# Altium PCB bm78.PcbDoc
Units mil, origin at the board's own origin, x right, y up, seen from the top; angles counter-clockwise.
Board outline 1210 x 1081 mil, 2 copper layers (Top, Bottom), stack 12.7 mil thick; 5 components, 21 nets, 91 pads, 69 vias.
Unrouted connection lines stored in the file: 73.
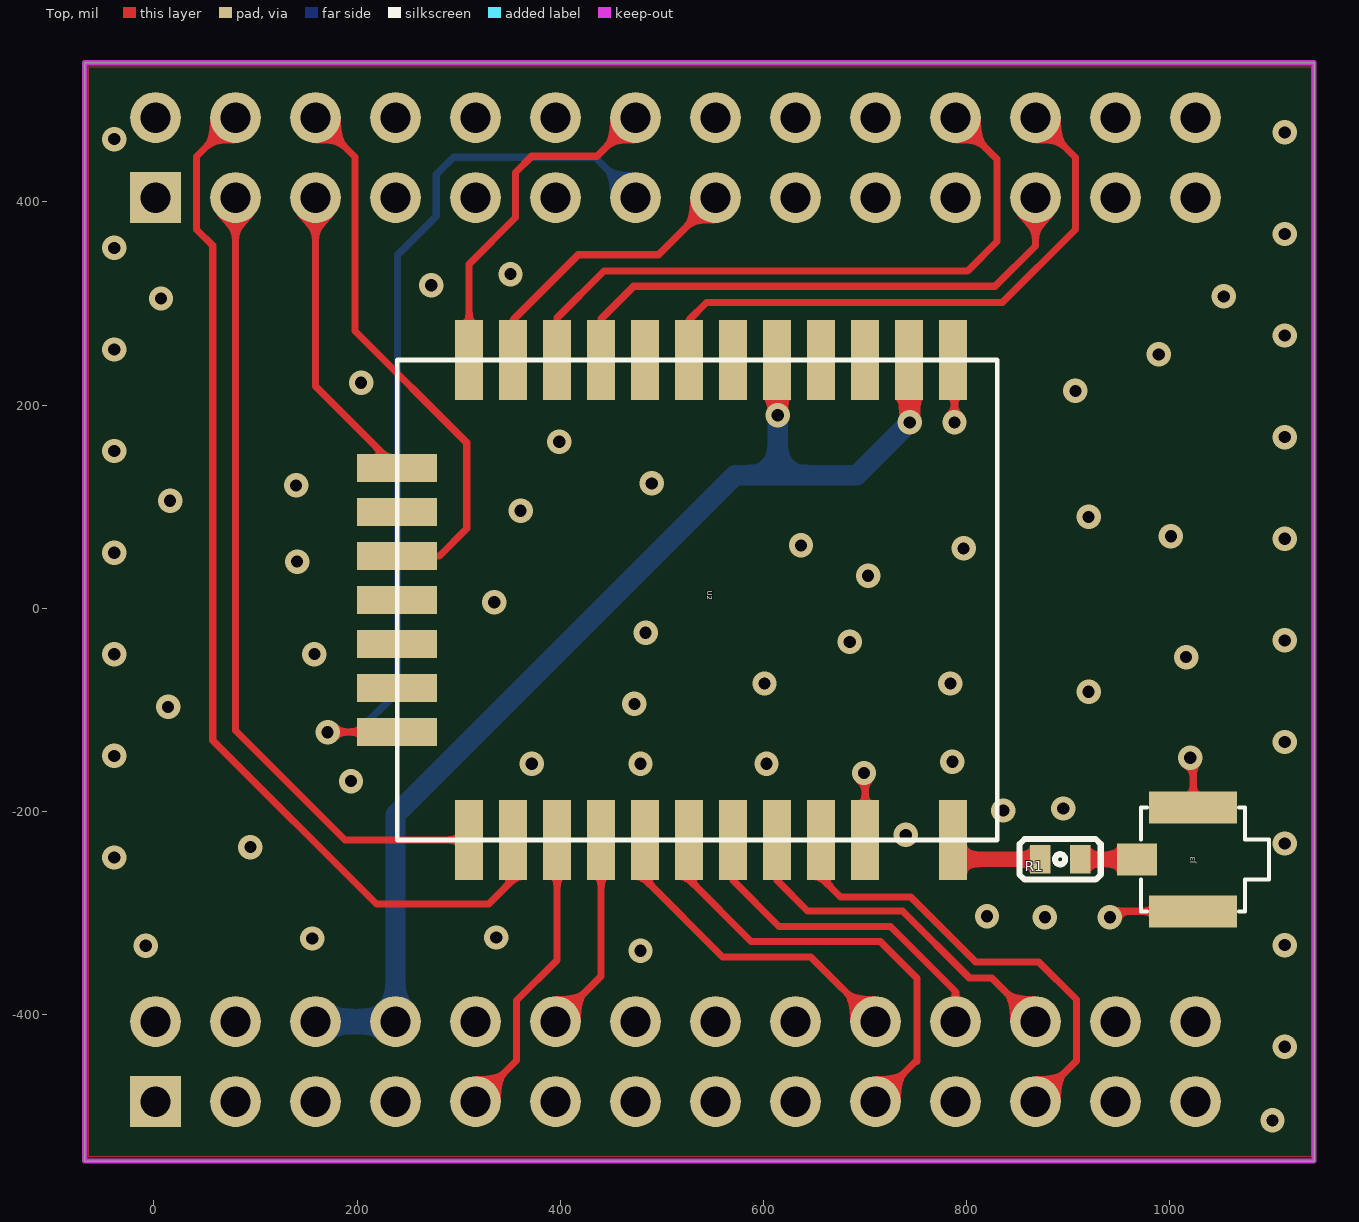
[diagram p0: Top view]
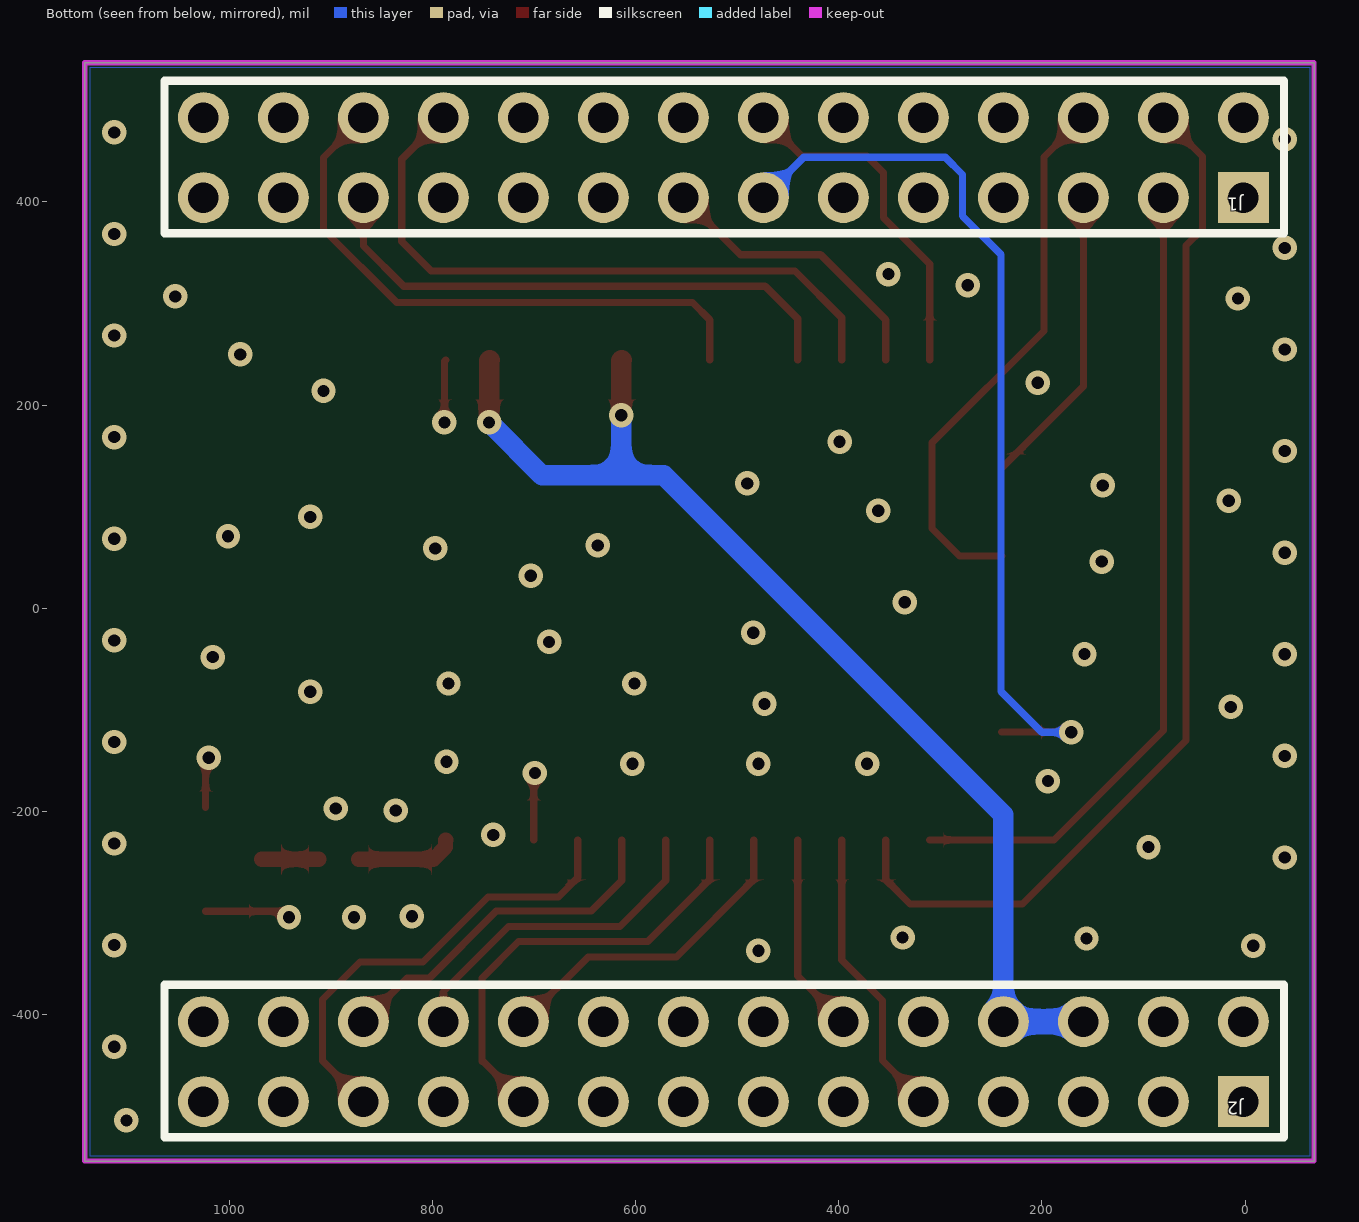
[diagram p1: Bottom view, seen from below]

## Layer stack, top to bottom
Solder Mask Top: solder mask 0.4, Solder Resist, Dk 3.5
Top: signal copper 1.35
Dielectric 1: dielectric 10, FR-4, Dk 4.3
Bottom: signal copper 1.35
Solder Mask Bottom: solder mask 0.4, Solder Resist, Dk 3.5

## Board outline
1142,537 1142,-544 -68,-544 -68,537

## Design rules (kind name [scope] priority, off if disabled: settings)
Clearance "Clearance - Default - DEFAULT- SMD" [IsVia vs IsSMTPin] p1: gap=0
Clearance "Clearance - Default - DEFAULT - Via" [IsVia vs IsVia] p2: gap=0
Clearance "Clearance - Default - DEFAULT - Net" [All] p3: gap=7 except(10: Fill-Fill Fill-Poly Fill-Region Poly-Poly Poly-Region Region-Region Text-Text)
ComponentClearance "ComponentClearance - Default - DEFAULT" [All] p1: gap=6 collisioncheckmode=3 verticalgap=10 showdistances=FALSE
HoleToHoleClearance "HoleToHoleClearance - Default - DEFAULT" [All] p1: gap=6 allowstackedmicrovias=TRUE
Length "Default Length" [All] p1: maxlimit=50000 minlimit=0
MaxMinImpedance "Default Impedance" [All] p1: minimum=50.00 maximum=150.0
ParallelSegment "Default Parallel Segment Same Layer" [All] p1: limit=1000 gap=200
ParallelSegment "Default Parallel Segment Adjasent" [All] p2: limit=1000 gap=200
PlaneConnect "Default PlaneConnect" [All] p1: planeconnectstyle=Relief reliefexpansion=20 reliefentries=0 reliefconductorwidth=5 reliefairgap=10
PolygonConnect "PolygonConnect - Default SMT" [IsSMTPin] p1: connectstyle=Relief reliefconductorwidth=5 reliefentries=4 polygonreliefangle="45 Angle" airgapwidth=10
PolygonConnect "PolygonConnect - Default Pad" [All] p2: connectstyle=Relief reliefconductorwidth=5 reliefentries=4 polygonreliefangle="45 Angle" airgapwidth=10
RoutingLayers "RoutingLayers - Default - DEFAULT" [All] p1: top layer_v5=TRUE bottom layer_v5=TRUE
RoutingPriority "RoutingPriority - Default - DEFAULT" [All] p1: routingpriority=3
RoutingTopology "Default Routing Topology" [All] p1: topology=Shortest
RoutingVias "RoutingVias - Default - DEFAULT" [All] p1: holewidth=37 width=55 viastyle="Through Hole" minholewidth=37 minwidth=55 maxholewidth=37 maxwidth=55
SMDToCorner "SMDToCorner - Default - DEFAULT" [All] p1: distance=0
SolderMaskExpansion "SolderMaskExpansion from CAM settings" [All] p1: expansion=5
Width "Default Width" [All] p1: maxlimit=50 minlimit=7 preferedwidth=7
22 further rules are at their usual default settings.

## Components (designator, comment, footprint, x,y, rotation, side; value= is the part's Value field where it differs from the comment)
J1 "CON28_2MM" CON28_2MM 1.62,404.25 r0 bottom
J2 "CON28_2MM" CON28_2MM 1.62,-485.51 r0 bottom
J3 "CON-IPEX" CON-IPEX 1023,-247 r90 top
R1 "R0402" R0402 892,-247 r0 top
U2 "MODULE_1215_1" MODULE_1215_1 239.5,244.5 r270 top

## Footprints (in the part's own frame and the unit in brackets; to place one, negate y for a bottom-side part, rotate by r counter-clockwise, add the part's x,y. Pads: shape width x height; smd on the part's side, far side on the other; paste and mask are expansions set on the pad)
CON28_2MM [mm]
  rect 1.27x1.27 hole 0.762: 1(0,0)
  round 1.27 hole 0.762: 2(0,-2) 3(2,0) 4(2,-2) 5(4,0) 6(4,-2) 7(6,0) 8(6,-2) 9(8,0) 10(8,-2) 11(10,0) 12(10,-2) 13(12,0) 14(12,-2) 15(14,0) 16(14,-2) 17(16,0) 18(16,-2) 19(18,0) 20(18,-2) 21(20,0) 22(20,-2) 23(22,0) 24(22,-2) 25(24,0) 26(24,-2) 27(26,0) 28(26,-2)
  silkscreen extent -1.02,-2.92 26.97,0.89
CON-IPEX [mm]
  rect 0.8x1 smd: 1(0,1.4)
  rect 0.8x2.2 smd: 2(-1.3,0) 3(1.3,0)
  Top pour cut-out: -1.3,1.3 1.3,1.3 1.3,-1.3 -1.3,-1.3 -1.3,1.3
  silkscreen extent -1.3,-1.9 1.3,1.3
MODULE_1215_1 [mm]
  rect 2x0.7 smd: 1(0,13.9) 2(0,12.8) 3(0,11.7) 4(0,10.6) 5(0,9.5) 6(0,8.4) 7(0,7.3) 8(0,6.2) 9(0,5.1) 10(0,4) 11(0,2.9) 12(0,1.8) 20(12,1.8) 21(12,2.9) 22(12,4) 23(12,5.1) 24(12,6.2) 25(12,7.3) 26(12,8.4) 27(12,9.5) 28(12,10.6) 29(12,11.7) 30(12,13.9)
  rect 0.7x2 smd: 13(2.7,0) 14(3.8,0) 15(4.9,0) 16(6,0) 17(7.1,0) 18(8.2,0) 19(9.3,0)
  silkscreen extent 0,0 12,15
R0402 [mil]
  rect 20x28 smd: 1(-19.69,0) 2(19.69,0)
  silkscreen extent -40,-20 40,20

## Via types
v1: diameter 24, hole 12, Top to Bottom, 69 vias

## Nets (pads, with @x,y where several pads share a name; then routed paths per layer and width w, separated by ;. In a path a pad name is that pad's centre, name@x,y a point inside that pad or via, vN(x,y) a via of type N, cw(c..) or ccw(c..) an arc to the next point about the centre after c; other vN are vias at no path point)
#RESET: J1.13 U2.19 | length 898.7
  Top w7: v1(171,-122) 171,-121.64 U2.19
  Bottom w7: v1(171,-122) 200,-122 240,-82 240,348 278,386 278,427 295,444 434.32,444 J1.13
GND: J1.1 J1.2 J1.27 J1.28 J2.1 J2.2 J2.27 J2.28 J3.2 J3.3 U2.1 U2.29 | length 262.9
  Top w7: v1(699,-162) 700.13,-163.13 U2.29 ; U2.1 788,243.24 v1(788,183) ; v1(941,-304) 946.82,-298.18 J3.2 ; v1(1020,-147) 1023,-150 J3.3
  other v1: 1101,-504 1113,-431.5 479,-337 -8,-332 1113,-331.5 156,-325 337,-324 877,-304 820,-303 -39,-245.18 95,-235 1113,-231.5 740,-223 836,-199 895,-197 194,-170 372,-153 479,-153 603,-153 786,-151 -39,-145.18 1113,-131.5 14,-97 473,-94 920,-82 601,-74 784,-74 1016,-48 -39,-45.18 158,-45 685,-33 1113,-31.5 484,-24 335,6 703,32 141,46 -39,54.82 797,59 637,62 1113,68.5 1001,71 920,90 361,96 16,106 140,121 490,123 -39,154.82 399,164 1113,168.5 907,214 204,222 989,250 -39,254.82 1113,268.5 7,305 1053,307 273,318 351,329 -39,354.82 1113,368.5 -39,461.82 1113,468.5
N503310: R1.1 U2.30 | length 97.4
  Top w15: U2.30 787,-228.2 787,-235 799,-247 R1.1
N503314: J3.1 R1.2 | length 56.2
  Top w15: R1.2 J3.1
P0_2: J1.15 U2.11 | length 288.4
  Top w7: U2.11 353.67,284 417.67,348 496.55,348 J1.15
P0_3: J1.14 U2.12 | length 343.8
  Top w7: U2.12 310.37,339 356,384.63 356,429 372,445 436.07,445 J1.14
P1_0: J2.9 U2.22 | length 290.9
  Top w7: J2.9 356.98,-445.11 356.98,-386 396.98,-346 U2.22
P1_1: J2.12 U2.23 | length 197.5
  Top w7: J2.12 440.29,-361.81 U2.23
P2_0: J2.20 U2.24 | length 323.6
  Top w7: U2.24 483.59,-267 559.59,-343 646.51,-343 J2.20
P2_1: J2.19 U2.25 | length 442.4
  Top w7: U2.25 526.9,-267 587.9,-328 715,-328 751,-364 751,-446 749.8,-446 J2.19
P2_2: J2.22 U2.26 | length 333.8
  Top w7: U2.26 570.21,-268 615.21,-313 725,-313 789.02,-377.02 J2.22
P2_4: J2.24 U2.27 | length 351.8
  Top w7: U2.27 613.52,-268 643.52,-298 737,-298 803,-364 824.99,-364 J2.24
P2_5: J2.23 U2.28 | length 455.1
  Top w7: U2.28 656.82,-265 675.82,-284 745,-284 809,-348 871,-348 908,-385 908,-445.28 J2.23
P3_0: J1.24 U2.7 | length 582.7
  Top w7: U2.7 526.9,284 543.9,301 835,301 907,373 907,443.76 J1.24
P3_1: J1.23 U2.9 | length 545.2
  Top w7: U2.9 440.29,285 472.29,317 828,317 867.76,356.76 J1.23
P3_2: J1.22 U2.10 | length 644.6
  Top w7: U2.10 396.98,286 442.98,332 801,332 830,361 830,442.02 J1.22
P4_0: J1.5 U2.13 | length 299.4
  Top w7: J1.5 159.1,218.6 U2.13
P4_1: J1.6 U2.15 | length 545.8
  Top w7: J1.6 198,444.09 198,273 308,163 308,78.59 281,51.59 U2.15
P4_2: J1.3 U2.20 | length 799.1
  Top w7: J1.3 80.36,-120.3 188,-227.94 U2.20
P4_3: J1.4 U2.21 | length 1046.9
  Top w7: J1.4 42,444.63 42,373 58,357 58,-130 219,-291 329.67,-291 353.67,-267 U2.21
VDD_BAT: J2.6 J2.8 U2.2 U2.5 | length 1123.8
  Top w20: U2.5 614,244.02 v1(614,190) ; U2.2 744,243.94 v1(744,183)
  Bottom w20: J2.8 237.84,-203 572,131.16 614,131.16 ; v1(614,190) 614,131.16 ; v1(744,183) 743.16,182.16 743,182.16 692,131.16 614,131.16
  Bottom w25: J2.6 J2.8
pads on no net: J1.7 J1.8 J1.9 J1.10 J1.11 J1.12 J1.16 J1.17 J1.18 J1.19 J1.20 J1.21 J1.25 J1.26 J2.3 J2.4 J2.5 J2.7 J2.10 J2.11 J2.13 J2.14 J2.15 J2.16 J2.17 J2.18 J2.21 J2.25 J2.26 U2.3 U2.4 U2.6 U2.8 U2.14 U2.16 U2.17 U2.18

## Polygon pours and split planes (outlines as drawn)
GND on Bottom (solid, remove dead copper, pour order 0): -64,532 1137,532 1137,-539 -64,-539
GND on Top (solid, remove dead copper, pour order 2): -64,533 1139,533 1139,-540 -64,-540

## Keep-outs
Keep-Out Layer:
  the board outline again, w5